# Altium PCB idealdiodeOR.PcbDoc
Units mil, origin at the board's own origin, x right, y up, seen from the top; angles counter-clockwise.
Board outline 2435.85 x 2620.85 mil, 2 copper layers (Top Layer, Bottom Layer); 62 components, 21 nets, 165 pads, 24 vias.
Unrouted connection lines stored in the file: 15.
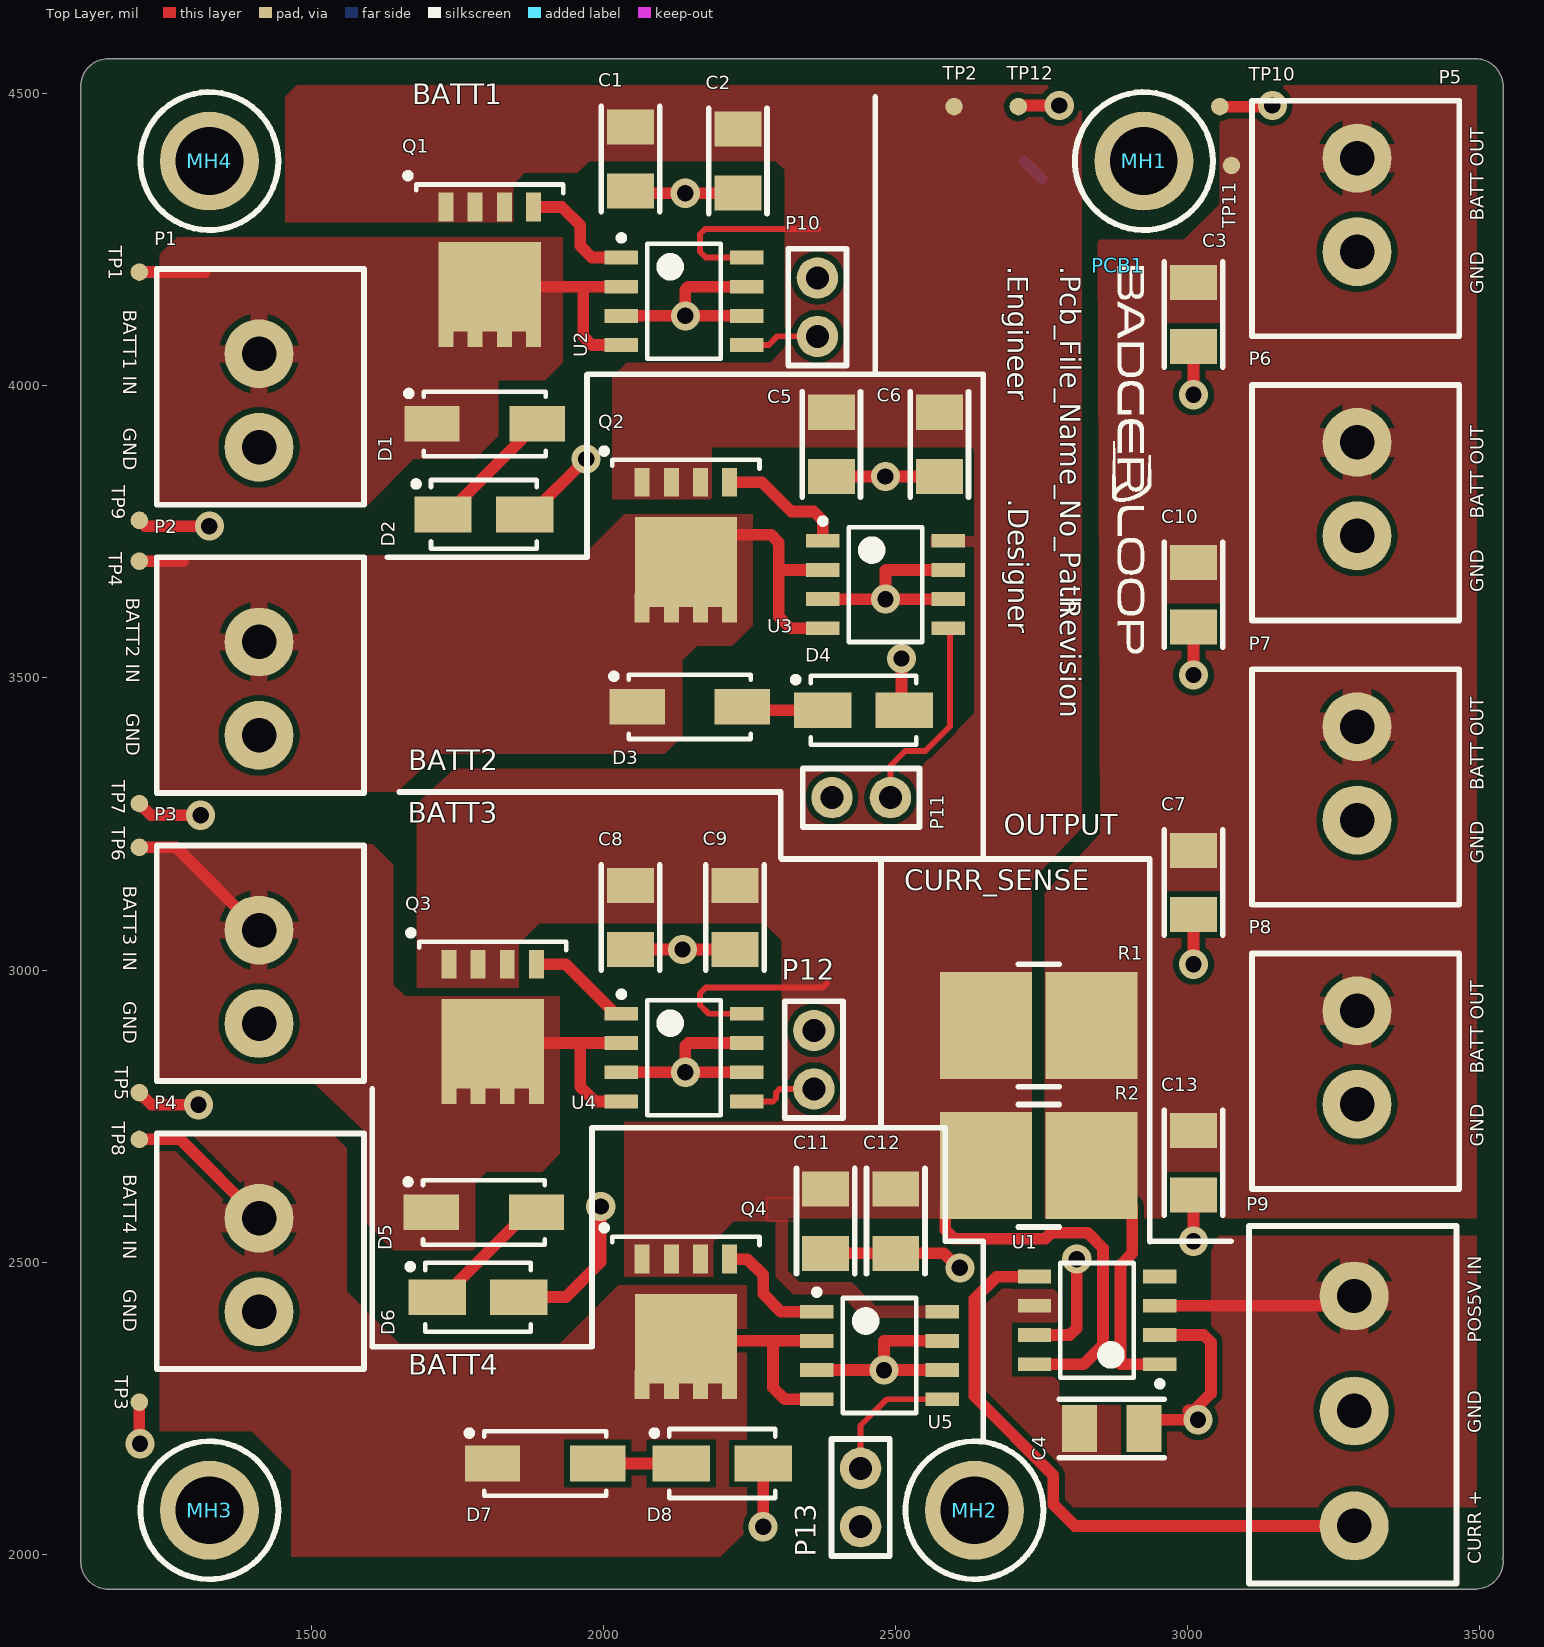
[diagram p0: Top Layer view]
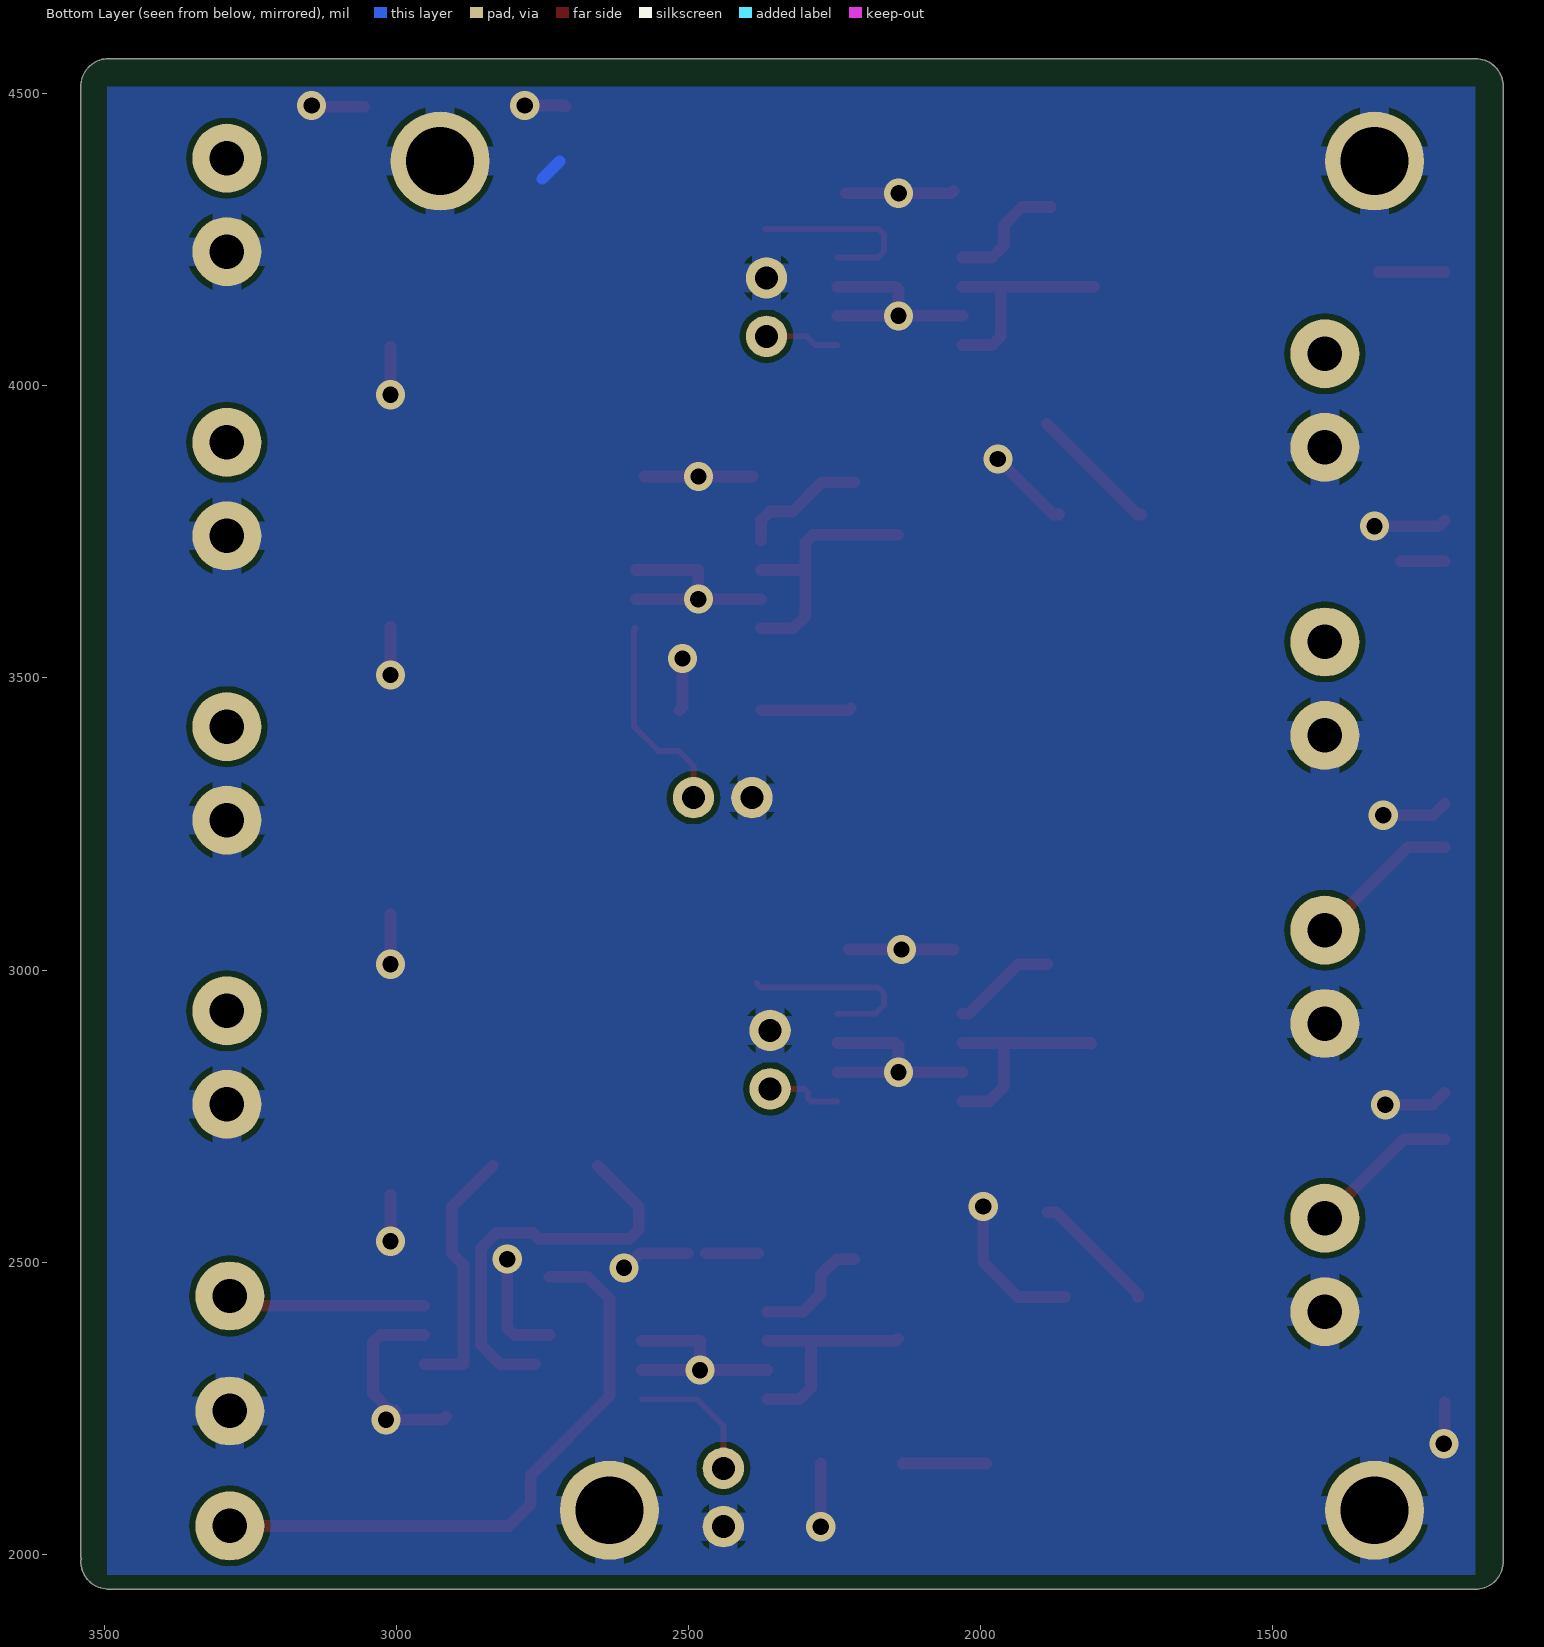
[diagram p1: Bottom Layer view, seen from below]
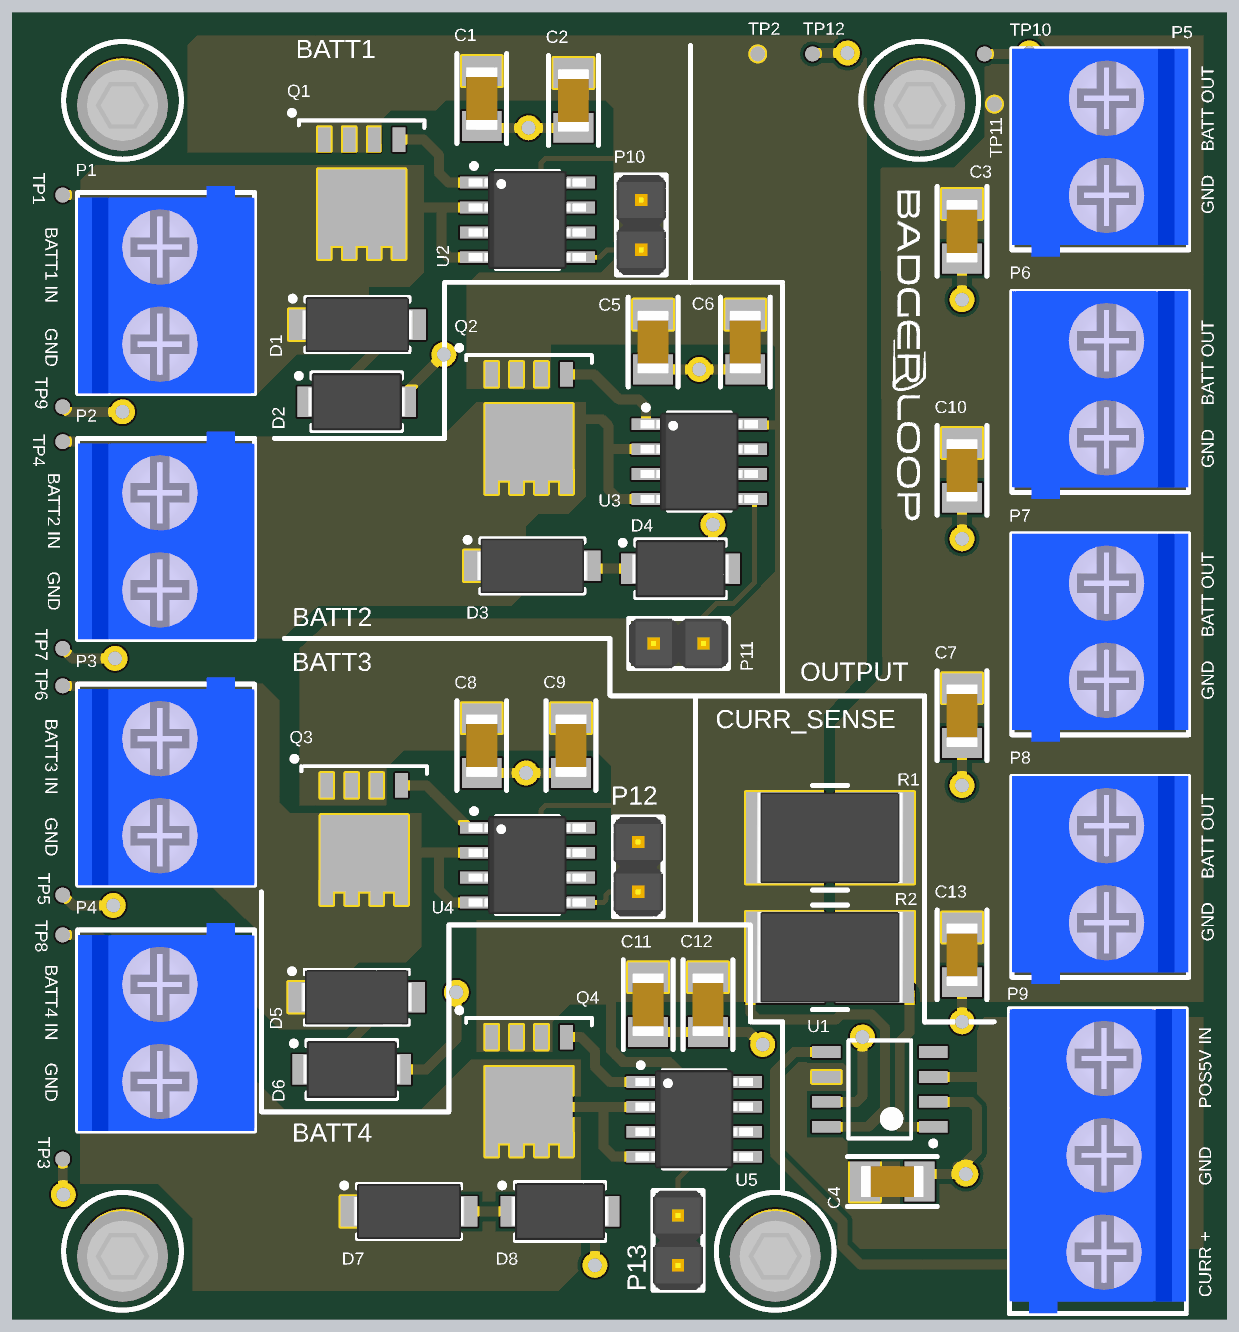
[diagram p2: 3D render of the assembled board from above, using the file's embedded part models]

## Layer stack, top to bottom
Top Solder: solder mask 0.4, Solder Resist, Dk 3.5
Top Layer: signal copper 1.4
Dielectric 1: dielectric 12.6, FR-4, Dk 4.8
Bottom Layer: signal copper 1.4
Bottom Solder: solder mask 0.4, Solder Resist, Dk 3.5

## Board outline
1104.73,1983.77 cw(c1109.59,1985) 1104.57,1985 1104.57,4512.4 cw(c1152.6,4512.4) 1152.6,4560.43 cw(c1152.6,4555.41) 1152.64,4560.43 3492.4,4560.43 cw(c3492.4,4555.41) 3492.4,4560.43 cw(c3492.4,4512.4) 3492.4,4560.43 3495,4560.43 cw(c3495,4555.41) 3496.23,4560.27 cw(c3492.4,4512.4) 3540.43,4512.4 cw(c3535.41,4512.4) 3540.28,4511.2 cw(c3535.41,4510) 3540.43,4510 cw(c3535.41,4510) 3540.43,4510 3540.03,1995 cw(c3535.01,1995) 3538.79,1991.7 cw(c3535.41,1988) 3540.43,1988 cw(c3492.4,1988) 3494.45,1940.01 cw(c3492.4,1944.59) 3492.4,1939.57 1152.6,1939.57 cw(c1152.6,1987.6)

## Design rules (kind name [scope] priority, off if disabled: settings)
Clearance [All] p1: gap=10 ignorepadtopadclearanceinfootprint=FALSE except(0: Arc-Hole Track-Hole SMDPad-Hole THPad-Hole Via-Hole Fill-Hole Poly-Hole Region-Hole Text-Hole)
HoleSize [All] p1: absolutevalues=TRUE maxlimit=250 minlimit=1 maxpercent=80.000 minpercent=20.000
MinimumSolderMaskSliver [All] p1: minsoldermaskwidth=5
PlaneConnect [All] p1: planeconnectstyle=Direct reliefexpansion=20 reliefentries=4 reliefconductorwidth=10 reliefairgap=10
PolygonConnect [All] p1: thpad.connectstyle=Relief thpad.reliefconductorwidth=50 thpad.reliefentries=4 thpad.polygonreliefangle="90 Angle" thpad.airgapwidth=10 smdpad.connectstyle=Direct smdpad.reliefconductorwidth=10 smdpad.reliefentries=4 smdpad.polygonreliefangle="90 Angle" smdpad.airgapwidth=10 via.connectstyle=Direct via.reliefconductorwidth=10 via.reliefentries=4 via.polygonreliefangle="90 Angle" via.airgapwidth=10
RoomDefinition idealdiodeOR [InComponentClass('idealdiodeOR')] p1: confinementstyle=ConfineIn formatcopy=TRUE lockcomponents=FALSE outline 1145,1930 3540,1930 3540,4565 1145,4565
RoutingVias [All] p1: holewidth=28 width=50 viastyle="Through Hole" minholewidth=28 minwidth=50 maxholewidth=28 maxwidth=50
SilkToSolderMaskClearance [IsPad] p1: minsilkscreentomaskgap=5 clearancetoexposedcopper=TRUE
SolderMaskExpansion [All] p1: expansion=4
Width [All] p1: maxlimit=100 minlimit=10 preferedwidth=10 minimp=50.000000 maximp=50.000000 favimp=50.000000
26 further rules are at their usual default settings.

## Components (designator, comment, footprint, x,y, rotation, side; value= is the part's Value field where it differs from the comment)
C1 "4700pF" SMD-1206C 2046.06,4388.76 r0 top
C2 "4700pF" SMD-1206C 2230,4385 r0 top
C3 "4700pF" SMD-1206C 3010,4122.31 r0 top
C4 "4700pF" SMD-1206C 2870,2215 r90 top
C5 "4700pF" SMD-1206C 2390,3900 r0 top
C6 "4700pF" SMD-1206C 2575,3900 r0 top
C7 "4700pF" SMD-1206C 3010,3150 r0 top
C8 "4700pF" SMD-1206C 2046.06,3090 r0 top
C9 "4700pF" SMD-1206C 2225,3090 r0 top
C10 "4700pF" SMD-1206C 3010,3642.5 r0 top
C11 "4700pF" SMD-1206C 2380,2570 r0 top
C12 "4700pF" SMD-1206C 2500,2570 r0 top
C13 "4700pF" SMD-1206C 3010,2670 r0 top
D1 "SMAJ24A" INDM5026X18N 1796.4,3935 r0 top
D2 "SMAT70A" SMAT70A 1665,3710 r0 top
D3 "SMAJ24A" INDM5026X18N 2147.5,3450.73 r0 top
D4 "SMAT70A" SMAT70A 2315,3375 r0 top
D5 "SMAJ24A" INDM5026X18N 1795,2585 r0 top
D6 "SMAT70A" SMAT70A 1655,2370 r0 top
D7 "SMAJ24A" INDM5026X18N 1900,2155 r0 top
D8 "SMAT70A" SMAT70A 2073.1,2085 r0 top
MH1 "4-40 Mount Hole" MH 2925,4385 r0 top
MH2 "4-40 Mount Hole" MH 2635,2075 r0 top
MH3 "4-40 Mount Hole" MH 1325,2075 r0 top
MH4 "4-40 Mount Hole" MH 1325,4385 r0 top
P1 "Screw Terminal 2x1" "2POS TERM BLOCK" 1410,3895 r90 top
P2 "Screw Terminal 2x1" "2POS TERM BLOCK" 1410,3401.67 r90 top
P3 "Screw Terminal 2x1" "2POS TERM BLOCK" 1410,2908.33 r90 top
P4 "Screw Terminal 2x1" "2POS TERM BLOCK" 1410,2415 r90 top
P5 "Screw Terminal 2x1" "2POS TERM BLOCK" 3290,4390 r270 top
P6 "Screw Terminal 2x1" "2POS TERM BLOCK" 3290,3903.33 r270 top
P7 "Screw Terminal 2x1" "2POS TERM BLOCK" 3290,3416.67 r270 top
P8 "Screw Terminal 2x1" "2POS TERM BLOCK" 3290,2930 r270 top
P9 "Screw Terminal 3x1" "3POS TERM BLOCK" 3285,2441.85 r270 top
P10 "Header 2" "Pin Header 1x2 TH Pitch 2.54mm" 2366.05,4085 r90 top
P11 "Header 2" "Pin Header 1x2 TH Pitch 2.54mm" 2491.05,3295 r180 top
P12 "Header 2" "Pin Header 1x2 TH Pitch 2.54mm" 2360,2796.55 r90 top
P13 "Header 2" "Pin Header 1x2 TH Pitch 2.54mm" 2440,2146.9 r270 top
PCB1 "PCB" PCB 2880,4206.55 r270 top
Q1 "STL90N6F7" DPAK228P991X238-4N 1805,4195 r180 top
Q2 "STL90N6F7" DPAK228P991X238-4N 2140.91,3723.58 r180 top
Q3 "STL90N6F7" DPAK228P991X238-4N 1810,2898.58 r180 top
Q4 "STL90N6F7" DPAK228P991X238-4N 2140.91,2393.58 r180 top
R1 "WSHM2818R0100FEA" CAPMP7146X15N 2745,2905 r0 top
R2 "WSHM2818R0100FEA" CAPMP7146X15N 2745,2665 r0 top
TP1 "TP" "Test Point" 1205,4195 r0 top
TP2 "TP" "Test Point" 2600,4478.28 r0 top
TP3 "TP" "Test Point" 1205,2260 r0 top
TP4 "TP" "Test Point" 1205,3700 r0 top
TP5 "TP" "Test Point" 1205,2790 r0 top
TP6 "TP" "Test Point" 1205,3210 r0 top
TP7 "TP" "Test Point" 1205,3285 r0 top
TP8 "TP" "Test Point" 1205,2710 r0 top
TP9 "TP" "Test Point" 1205,3770 r0 top
TP10 "TP" "Test Point" 3055,4478.28 r0 top
TP11 "TP" "Test Point" 3075,4377.5 r0 top
TP12 "TP" "Test Point" 2710,4478.28 r0 top
U1 "INA240x" SOIC127P600X175-8N 2845,2400 r180 top
U2 "LTC4359" 8SOP 1992.72,4035 r0 top
U3 "LTC4359" 8SOP 2337.72,3550 r0 top
U4 "LTC4359" 8SOP 1992.72,2740 r0 top
U5 "LTC4359" 8SOP 2327.28,2230 r0 top

## Footprints (in the part's own frame and the unit in brackets; to place one, negate y for a bottom-side part, rotate by r counter-clockwise, add the part's x,y. Pads: shape width x height; smd on the part's side, far side on the other; paste and mask are expansions set on the pad)
"2POS TERM BLOCK" [mm] "5mm Pitch"
  round 3 hole 1.5: 1(0,0) 2(4.064,0)
  silkscreen extent -2.5,-4.57 7.75,4.45, body extent -2.51,-4.57 8.09,4.43, height 12.6
"3POS TERM BLOCK" [mm] "5mm Pitch"
  round 3 hole 1.5: 1(0,0) 2(5,0) 3(10,0)
  silkscreen extent -3.05,-4.57 12.5,4.45, body extent -3.03,-4.57 12.49,4.43, height 12.6
8SOP [mm]
  rect 1.45x0.6 smd: 1(0.958,4.699) 2(0.958,3.429) 3(0.958,2.159) 4(0.958,0.889) 5(6.408,0.889) 6(6.408,2.159) 7(6.408,3.429) 8(6.408,4.699)
  silkscreen extent 0.83,0.29 5.28,5.67, body extent 0.69,0.29 6.68,5.29, height 1.75
CAPMP7146X15N [mm] "Molded Capacitor, 2-Leads, Body 7.10x4.60mm, IPC Medium Density"
  rect 4x4.65 smd: 1(-2.286,0) 2(2.286,0)
  silkscreen extent -0.89,-2.67 0.89,2.67, body extent -3.77,-2.3 3.77,2.3, height 1.5
DPAK228P991X238-4N [mm] "D-PAK, 4-Pads, Body 6.21x6.54mm (max), IPC Medium Density"
  rect 0.65x1.25 smd: 1(1.905,-2.83) 2(0.635,-2.83) 3(-0.635,-2.83) 4(-1.905,-2.83) 5(-1.905,2.631) 6(-0.635,2.631) 7(0.635,2.631) 8(1.905,2.631)
  rect 4.45x3.9 smd: 8(0,0.635)
  silkscreen extent -3.2,-4.32 3.68,-3.43, body extent -2.29,-2.79 2.29,2.92, height 1.45
INDM5026X18N [mm] "Molded Inductor, 2-Leads, Body 5.04x2.59mm, IPC Medium Density"
  rect 2.4x1.55 smd: 1(-2.286,0) 2(2.286,0)
  silkscreen extent -3.42,-1.4 2.65,1.45, body extent -2.86,-1.4 2.86,1.4, height 1.8
MH [mm] "#10 Mount Hole"
  round 4.3 hole 2.946 unplated: 2(0,0)
  silkscreen extent -3,-3 3,3, body extent -2.32,-2.58 2.32,2.07, height 2.84
PCB [mil]
  silkscreen extent 2,-9 665,58
"Pin Header 1x2 TH Pitch 2.54mm" [mm] "PinHeader 1x2 TH Pitch 2.54mm"
  round 1.8 hole 1: 1(0,0) 2(2.54,0)
  silkscreen extent -1.27,-1.27 3.81,1.27, body extent -1.27,-1.27 3.81,1.27, height 9.5
SMAT70A [mm]
  rect 2.5x1.55 smd: 1(1.524,1.778) 2(5.08,1.778)
  silkscreen extent 0.23,0.28 5.6,3.28, body extent 0.78,0.32 5.82,3.24, height 2.3
SMD-1206C [mil]
  rect 80x60 smd: 1(0,55) 2(0,-55)
  silkscreen extent -50,-90 50,90, body extent -31,-63 32,63, height 39
SOIC127P600X175-8N [mm] "SOIC, 8-Leads, Body 4.90x3.90mm, Pitch 1.27mm, IPC Medium Density"
  rect 1.45x0.6 smd: 1(-2.725,1.905) 2(-2.725,0.635) 3(-2.725,-0.635) 4(-2.725,-1.905) 5(2.725,-1.905) 6(2.725,-0.635) 7(2.725,0.635) 8(2.725,1.905)
  silkscreen extent -2.85,-2.5 1.6,2.88, body extent -2,-2.5 2,2.5, height 1.75
"Test Point" [mil] "SMD Test Point"
  round 30 smd: 1(0,0)

## Part data
C1 C2 C3 C4 C5 C6 C7 C8 C9 C10 C11 C12 C13: library part GCJ31BR72J472KXJ1L, "CAP CER 4700PF 630V X7R 1206", Manufacturer="Murata Electronics North America", Operating Temperature="-55°C ~ 125°C", Package / Case="1206 (3216 Metric)", Ratings=AEC-Q200, Temperature Coefficient=X7R, Tolerance=±10%, Voltage=630V, @ qty=0, Applications="Automotive, Boardflex Sensitive", Datasheets=http://www.murata.com/~/media/webrenewal/support/library/catalog/products/capacitor/mlcc/c03e.ashx, Digikey P/N=490-5610-1-ND, Factory Stock=0, Features="Soft Termination", Height - Seated (Max)=-, Image=//media.digikey.com/Renders/Murata%20Renders/GR331BD72E473KW01L.jpg, Lead Spacing=-, Lead Style=-, Minimum Quantity=1, Mounting Type="Surface Mount, MLCC", Packaging="Cut Tape (CT)", Part Number=GCJ31BR72J472KXJ1L, Part Status=Active, Quantity Available=6697, Series=GCJ, Size / Dimension="0.126\" L x 0.063\" W (3.20mm x 1.60mm)", Thickness (Max)="0.049\" (1.25mm)", Unit Price (USD)=0.48
D1 D3 D5 D7: "TVS DIODE 24V 38.9V DO214AC", Manufacturer="LittelFuse Inc", Digikey Link=https://www.digikey.com/product-detail/en/littelfuse-inc/SMAJ24A/SMAJ24ALFCT-ND/762500, Digikey P/N=SMAJ24ALFCT-ND, Manufacturer P/N=SMAJ24A
D2 D4 D6 D8: "TVS DIODE 70V 100V SMA", Manufacturer="Diodes Incorporated", Manufacturer P/N=SMAT70A-13-F, Digikey Link=https://www.digikey.com/product-detail/en/diodes-incorporated/SMAT70A-13-F/SMAT70A-FDICT-ND/804910, Digikey P/N=SMAT70A-FDICT-ND
P1 P2 P3 P4 P5 P6 P7 P8: "Screw Terminal, 2-Pin"
P9: "Screw Terminal, 3-Pin", LatestRevisionDate=17-Jul-2002, LatestRevisionNote="Re-released for DXP Platform.", Publisher="Altium Limited"
P10 P11 P12 P13: "Header, 2-Pin", LatestRevisionDate=17-Jul-2002, LatestRevisionNote="Re-released for DXP Platform.", Publisher="Altium Limited"
Q1 Q2 Q3 Q4: "MOSFET N-CH 60V 90A F7 8PWRFLAT", Manufacturer=497-15913-2-ND, Digikey Link=https://www.digikey.com/product-detail/en/stmicroelectronics/STL90N6F7/497-15913-1-ND/5357115, Digikey P/N=497-15913-2-ND, Manufacturer P/N=STL90N6F7
R1 R2: "RES 0.01 OHM 1% 7W 2818", Manufacturer="Vishay Dale", Power Rating=7W, Resistance=10m, Digikey Link=https://www.digikey.com/product-detail/en/vishay-dale/WSHM2818R0100FEA/541-2626-1-ND/5419333, Digikey P/N=541-2626-1-ND, Manufacturer P/N=WSHM2818R0100FEA
U1: "IC AMP CURRENT SENSE 8-TSSOP", Manufacturer=TI, Manufacturer P/N=INA240A1PWR, Digikey Link=https://www.digikey.com/product-detail/en/texas-instruments/INA240A1PWR/296-45088-1-ND/6562101, Digikey P/N=296-45088-1-ND
U2 U3 U4 U5: "IC OR CTRLR N+1 8MSOP", Manufacturer="Analog Devices", Digikey Link=https://www.digikey.com/product-detail/en/linear-technology-analog-devices/LTC4359HMS8-TRPBF/LTC4359HMS8-TRPBFCT-ND/8275335, Digikey P/N=LTC4359HMS8#TRPBFCT-ND, Manufacturer P/N=LTC4359

## Via types
v1: diameter 50, hole 28, Top Layer to Bottom Layer, 24 vias

## Nets (pads, with @x,y where several pads share a name; then routed paths per layer and width w, separated by ;. In a path a pad name is that pad's centre, name@x,y a point inside that pad or via, vN(x,y) a via of type N, cw(c..) or ccw(c..) an arc to the next point about the centre after c; other vN are vias at no path point)
BATT1: D1.1 P1.2 Q1.5 Q1.6 Q1.7 Q1.8 TP1.1 U2.2 U2.4 | length 494.4
  Top Layer w20: TP1.1 1317.31,4195 ; Q1.8@1805,4170 1965,4170 ; U2.4 1980,4070 1965,4085 1965,4170 ; U2.2 1965,4170
BATT2: D3.1 P2.2 Q2.5 Q2.6 Q2.7 Q2.8 TP4.1 U3.2 U3.4 | length 525.6
  Top Layer w20: TP4.1 1280,3700 ; Q2.8@2140.91,3745 2286.88,3745 2300,3731.88 2300,3685 ; U3.4 2320,3585 2300,3605 2300,3685 ; U3.2 2300,3685
BATT3: D5.1 P3.2 Q3.5 Q3.6 Q3.7 Q3.8 TP6.1 U4.2 U4.4 | length 640.5
  Top Layer w20: TP6.1 1268.33,3210 P3.2 ; Q3.8@1810,2873.58 1811.42,2875 1960,2875 ; U4.4 1985,2775 1960,2800 1960,2875 ; U4.2 1960,2875
BATT4: D7.1 P4.2 Q4.5 Q4.6 Q4.7 Q4.8 TP8.1 U5.2 U5.4 | length 649.8
  Top Layer w20: TP8.1 1275,2710 P4.2 ; Q4.8@2140.91,2368.58 2144.49,2365 2290,2365 ; U5.4 2310,2265 2290,2285 2290,2365 ; U5.2 2290,2365
GND: C1.2 C2.2 C3.2 C4.2 C5.2 C6.2 C7.2 C8.2 C9.2 C10.2 C11.2 C12.2 C13.2 D2.2 D4.2 D6.2 D8.2 MH1.2 MH2.2 MH3.2 MH4.2 P1.1 P2.1 P3.1 P4.1 P5.2 P6.2 P7.2 P8.2 P9.2 P10.2 P11.2 P12.2 P13.2 TP3.1 TP5.1 TP7.1 TP9.1 TP10.1 TP12.1 U1.2 U1.7 U2.3 U2.6 U2.7 U3.3 U3.6 U3.7 U4.3 U4.6 U4.7 U5.3 U5.6 U5.7 | length 4323.9
  Top Layer w20: TP3.1 1205,2190 v1(1206.25,2188.75) ; TP5.1 1225.81,2769.19 v1(1306.45,2769.19) ; TP7.1 1225,3265 v1(1310,3265) ; TP9.1 1215,3760 v1(1325,3760) ; D6.2 1935,2440 1995,2500 v1(1995,2595) ; D2.2 1875,3780 v1(1970,3875) ; U4.3 v1(2140,2825) ; U2.3 v1(2140,4120) ; C8.2 v1(2135,3035) C9.2 ; C1.2 2049.82,4330 C2.2 ; U4.6 v1(2140,2825) ; U4.7 2145,2875 2140,2870 v1(2140,2825) ; U2.6 v1(2140,4120) ; U2.7 2145,4170 2140,4165 v1(2140,4120) ; v1(2273.1,2046.9) D8.2 ; U5.3 v1(2480,2315) ; U3.3 v1(2482.72,3635) ; C11.2 C12.2@2470,2515 ; C5.2 C6.2 ; C12.2 2582.57,2515 2607.57,2490 v1(2610,2490) ; v1(2510,3533.47) 2510,3450 D4.2 ; U5.6 v1(2480,2315) ; U5.7 2480,2365 v1(2480,2315) ; U3.6 v1(2482.72,3635) ; U3.7 2483.33,3685 2482.72,3684.38 v1(2482.72,3635) ; TP12.1 2711.83,4480.1 v1(2780,4480.1) ; U1.7 2798.19,2375 2810,2386.81 v1(2810,2505) ; C4.2@2915,2235 2920,2230 v1(3017.65,2230) 3016.55,2230 v1@3011.55,2235 ; U1.2 3027.65,2375 3040,2362.65 3040,2275 3010.69,2245.69 v1@3000.86,2245.69 ; v1(3010,2535.61) C13.2 ; v1(3010,3010) C7.2 ; v1(3010,3505) C10.2 ; v1(3010,3985) C3.2 ; TP10.1 3143.17,4478.28 v1(3145,4480.1)
  Bottom Layer w20: 2720,4385 2750,4355
  other v1: 2482.5,3845 2139.91,4330
NetC1_1: C1.1 C2.1 C5.1 C6.1 C8.1 C9.1 C11.1 C12.1 Q1.1 Q1.2 Q1.3 Q2.1 Q2.2 Q2.3 Q3.1 Q3.2 Q3.3 Q4.1 Q4.2 Q4.3 R1.1 R2.1 TP2.1 U1.8 U2.8 U3.8 U4.8 U5.8 | length 1354.3
  Top Layer w10: U4.8 2180,2925 2165,2940 2165,2960 2175,2970 2375.19,2970 2382.91,2977.72 ; U2.8 2175,4220 2165,4230 2165,4260 2173.55,4268.55 2368.14,4268.55
  Top Layer w20: R2.1 2585,2595 2585,2555 2600,2540 2756.36,2540 2766.36,2550 2828.64,2550 2855,2523.64 2855,2358.19 2821.81,2325 U1.8@2762.5,2325
NetC3_1: C3.1 C7.1 C10.1 C13.1 P5.1 P6.1 P7.1 P8.1 R1.2 R2.2 TP11.1 U1.1 | length 462.2
  Top Layer w20: R2.2 2905,2595 2905,2515 2885,2495 2885,2325 U1.1 ; P5.1@3277.5,4377.5 P5.1
NetD1_2: D1.2 D2.1 | length 225.6
  Top Layer w20: D2.1 1731.4,3780 D1.2
NetD3_2: D3.2 D4.1 | length 153.8
  Top Layer w20: D3.2@2222.31,3447.69 2225,3445 D4.1
NetD5_2: D5.2 D6.1 | length 218
  Top Layer w20: D6.1@1730,2440 1730,2445 1870,2585 D5.2
NetD7_2: D7.2 D8.1 | length 143.1
  Top Layer w20: D7.2 D8.1
NetP9_3: P9.3 U1.5 | length 1056.8
  Top Layer w20: U1.5 2672.8,2475 2635,2437.2 2635,2270 2770,2135 2770,2085 2806.85,2048.15 P9.3
NetP10_1: P10.1 U2.5 | length 127.3
  Top Layer w10: U2.5 2245.19,4070.19 2282.69,4070.19 2297.5,4085 P10.1
NetP11_1: P11.1 U3.5 | length 355.6
  Top Layer w10: P11.1 2491.05,3349.55 2516.5,3375 2550.81,3375 2593.19,3417.37 2593.19,3585 U3.5
NetP12_1: P12.1 U4.5 | length 129.8
  Top Layer w10: U4.5 2290,2775 2295,2780 2295,2790 2301.55,2796.55 P12.1
NetP13_1: P13.1 U5.5 | length 231.3
  Top Layer w10: P13.1 2440,2220 2485,2265 U5.5
NetQ1_4: Q1.4 U2.1 | length 206.7
  Top Layer w20: Q1.4 1928.58,4306.42 1960,4275 1960,4240 1980,4220 U2.1
NetQ2_4: Q2.4 U3.1 | length 221.2
  Top Layer w20: Q2.4 2271.2,3835 2321.2,3785 2360,3785 2375.43,3769.57 U3.1
NetQ3_4: Q3.4 U4.1 | length 180.6
  Top Layer w20: Q3.4 1935,3010 2020,2925 U4.1
NetQ4_4: Q4.4 U5.1 | length 205.4
  Top Layer w20: Q4.4 2246.08,2505 2273.1,2477.98 2273.1,2445.44 2303.54,2415 U5.1
POS5V: C4.1 P9.1 U1.3 U1.6 | length 339.7
  Top Layer w20: U1.3 3268.15,2425 P9.1
pads on no net: U1.4

## Polygon pours and split planes (outlines as drawn)
GND on Bottom Layer "Bottom Layer-GND" (solid, pour order 0): 1152.6,4512.4 1152.6,1965 3495,1965 3495,4512.4
NetC3_1 on Top Layer "Top Layer-NetC3_1" (solid, pour order 68): 3495,2575 3495,4515 3055,4515 3055,4311.42 2993.58,4250 2846.03,4250 2849.98,3233.19 2755,3131.43 2755,2575 3065,2575
BATT4 on Top Layer "Top Layer-BATT4" (solid, pour order 64): 2245,2040 2245,2235 2245,2460 2025,2460 1925,2360 1650,2360 1560,2450 1560,2695 1535,2720 1238.56,2720 1240.2,1995 1239.74,2210 1397.25,2210 1465,2142.25 1465,1995 1240.21,1995 1240.2,1995 2200,1995
NetC1_1 on Top Layer "Top Layer-NetC1_1" (solid, pour order 60): 1680,2970 1855,2970 1855,3045 1890,3080 2275,3080 2305,3050 2305,2934.89 2305,2915 2305,2740 2035,2740 2035,2475 2187.5,2475 2187.5,2535 2222.5,2570 2295,2570 2295,2475 2325,2445 2405,2445 2445,2405 2600,2405 2600,2425 2465,2425 2425,2465 2335.2,2465 2315,2485.2 2315,2575 2733.35,2575 2733.35,3152.54 2818.93,3243.59 2818.93,4509.42 2813.35,4515 1475,4515 1455,4495 1455,4280 1845,4280 1845,4345 1865,4365 1955,4365 1975,4385 2295,4385 2310,4370 2310,4065 2285,4040 2040,4040 2015,4015 2015,3806.22 2185,3804.77 2185,3895 2630,3895 2635,3890 2635,3742.4 2560,3742.4 2560,3724.61 2635,3724.61 2635,3440 2540,3345 1745,3345 1680,3285
POS5V on Top Layer "Top Layer-POS5V" (solid, remove dead copper, pour order 56): 3495,2545 3040,2545 3040,2320.86 2974.14,2255 2780,2255 2780,2455 2655,2455 2655,2125 2700,2080 3495,2080
no net on Top Layer "Top Layer-No Net" (solid, pour order 42): 2306.25,2570
NetC1_1 on Top Layer "Top Layer-NetC1_1 1" (solid, pour order 40): 2332.5,2570 2280,2570 2280,2610 2335,2610
BATT2 on Top Layer "Top Layer-BATT2" (solid, pour order 34): 1237.5,3305 1645.71,3305 1717.68,3370 2105,3370 2135,3400 2135,3530 2160,3555 2220,3555 2255,3590 2255,3780 2035,3780 1965,3710 1240,3710 1235,3705 1237.5,3702.5
BATT3 on Top Layer "Top Layer-BATT3" (solid, pour order 6): 1238.56,3210 1243.56,3215 1605,3215 1640,3180 1640,2975 1660,2955 1925,2955 1925,2685 1895,2655 1800,2655 1780,2635 1780,2520 1640,2520 1595,2565 1595,2720 1495,2815 1238.56,2815
BATT1 on Top Layer "Top Layer-BATT1" (solid, pour order 2): 1240.38,4225.38 1270,4255 1930,4255 1930,4040 1900,4010 1820,4010 1820,3915 1780,3875 1675,3875 1595,3795 1235,3795

## Other copper
Top Layer:
  text ".Layer_Name" at 1242.17,1755 h60
Bottom Layer:
  text ".Layer_Name" at 1240,1755 h60

## Silkscreen, mask and mechanical layers (free items; w line width, h text height)
Top Overlay:
  lines w10: 1603.75,2796.25 1603.75,2355 1980,2355 1980,2730 2475,2730 ; 1630,3706.67 1971.67,3706.67 1971.67,4012.53 ; 1650,3305 2303.24,3305 2303.24,3191.76 2305,3190 2650,3190 ; 1971.67,3978.33 1971.67,4019.28 1972.38,4020 2650,4020 2650,3190 ; 2465,4019.95 2465,4495 ; 2465,4020 2465,4070 ; 2475,3190 2475,2730 ; 2585,2535.61 2585,2730 2475,2730 ; 2588.76,2535.61 2650,2535.61 2650,2195 ; 2935.61,2535 2935,2535.61 ; 3074.39,2535.61 2935,2535.61 ; 2650,3190 2935,3190 2935,2590 2935,2535.61
  text "BATT1" at 1672.4,4470 h60
  text "BATT OUT" at 3515,4282.78 h40 r90
  text "GND" at 3515,4157.17 h40 r90
  text "BATT1 IN" at 1170,4130.7 h40 r270
  text "GND" at 1170,3928.44 h40 r270
  text "BATT OUT" at 3515,3772.78 h40 r90
  text "GND" at 3515,3647.17 h40 r90
  text "BATT2 IN" at 1175,3637.37 h40 r270
  text "GND" at 1175,3439.5 h40 r270
  text "BATT2" at 1665.39,3330 h60
  text "BATT OUT" at 3515,3307.78 h40 r90
  text "BATT3" at 1665,3240 h60
  text "OUTPUT" at 2685,3220 h60
  text "GND" at 3515,3182.17 h40 r90
  text "BATT3 IN" at 1170,3144.04 h40 r270
  text "CURR_SENSE" at 2515,3125 h60
  text "GND" at 1170,2946.17 h40 r270
  text "BATT OUT" at 3515,2822.78 h40 r90
  text "GND" at 3515,2697.17 h40 r90
  text "BATT4 IN" at 1170,2650.7 h40 r270
  text "GND" at 1170,2453.44 h40 r270
  text "POS5V IN" at 3510,2362.23 h40 r90
  text "BATT4" at 1665.14,2295 h60
  text "GND" at 3510,2207.17 h40 r90
  text "CURR +" at 3510,1982.96 h40 r90
BoardOutline:
  lines w10: 1109.59,1985 1109.59,4512.4 cw(c1152.6,4512.4) 1152.6,4555.41 3495,4555.41 ; 1109.59,1987.6 ccw(c1152.6,1987.6) 1152.6,1944.59 3492.4,1944.59 ; 3492.4,1944.98 ccw(c3492.4,1988) 3535.41,1988 ; 3492.4,4555.41 cw(c3492.4,4512.4) 3535.41,4512.4 ; 3535.01,1995 3535.41,4510
DesignerNotes:
  drawing of 46 lines, arcs and shapes, not listed
  text "1" at 1258.84,8327.5 h70
  text "2" at 3754.5,8327.5 h70
  text "3" at 6243.84,8327.5 h70
  text "4" at 8750.51,8327.5 h70
  text "A" at 102.5,7730 h70
  text "A" at 10745,7730 h70
  text "B" at 10742.5,5857 h70
  text "B" at 102.5,5804.5 h70
  text "C" at 10742.5,3482 h70
  text "C" at 102.5,3429.5 h70
  text "1.      PCB must be 0.030\" thick +/- 10% / 2.      Board Size: / 3.      Electrical Test / 4.      Coloring: / a.      Green Solder Mask Top / b.      Green Solder Mask Bottom / c.      White Silkscreen Top / d.      White Silkscreen Bottom / 5.      Via annular ring clearance is 10mil minimum / 6.      Vias are to be covered by soldermask (tented) /          Components with througholes are P1, J1, J2,          /  J6, P2, P10, P21, MH1-MH6 /          All other holes are Vias" at 7415,2985 h150
  text "ENGINEER:" at 6217.5,1267.5 h45
  text "TITLE:" at 7717.5,1267.5 h45
  text ".Engineer" at 6257.5,1145.35 h110
  text "D" at 10742.5,1112 h70
  text "D" at 102.5,1059.5 h70
  text ".PCB_FILE_NAME_NO_PATH" at 7812.5,1019.78 h200
  text "PCB DESIGNER:" at 6217.5,972.5 h45
  text ".Designer" at 6252.5,842.5 h110
  text "DATE:" at 6217.5,667.5 h45
  text "PART NO.:" at 7717.5,667.5 h45
  text "REV:" at 9817.5,667.5 h45
  text "Badgerloop" at 4917.5,567.5 h110
  text ".PRINT_DATE" at 6267.5,547.5 h110
  text ".Part_Number" at 7787.5,542.5 h110
  text ".Revision" at 9827.5,542.5 h110
  text "ERB Room 133" at 4917.5,467.5 h110
  text "1400 Engineering Drive" at 4917.5,367.5 h110
  text "FILE NAME:" at 6217.5,367.5 h45
  text "DWG NO:" at 7717.5,367.5 h45
  text "SCALE:" at 9817.5,367.5 h45
  text "Madison, WI 53706" at 4917.5,267.5 h110
  text ".PCB_FILE_NAME_NO_PATH" at 6267.5,247.5 h110
  text "1:1" at 9832.5,242.5 h110
  text "1" at 1258.84,27.5 h70
  text "2" at 3754.5,27.5 h70
  text "3" at 6243.84,27.5 h70
  text "4" at 8750.51,27.5 h70
Drill Drawing:
  drawing of 158 lines, arcs and shapes, not listed
  text "Layer" at 5050.34,7815 h60
  text "Name" at 5301.09,7815 h60
  text "Material" at 5785.65,7815 h60
  text "Thickness" at 6221.23,7815 h60
  text "Constant" at 6579.01,7815 h60
  text "Board Layer Stack" at 6910.28,7815 h60
  text "Symbol" at 851.87,7734.47 h72
  text "Count" at 1133.44,7734.47 h72
  text "Hole Size" at 1395.32,7734.47 h72
  text "Plated" at 1967.79,7734.47 h72
  text "Hole Type" at 2214.99,7734.47 h72
  text "Drill Layer Pair" at 2574.88,7734.47 h72
  text "Via/Pad" at 3255.86,7734.47 h72
  text "Pad Shape" at 3550.71,7734.47 h72
  text "Template" at 3935.98,7734.47 h72
  text "1" at 5050.34,7695 h60
  text "Top Overlay" at 5301.09,7695 h60
  text "24" at 1133.44,7610.52 h60
  text "28.00mil (0.711mm)" at 1395.32,7610.52 h60
  text "PTH" at 1967.79,7610.52 h60
  text "Round" at 2214.99,7610.52 h60
  text "Top Layer - Bottom Layer" at 2574.88,7610.52 h60
  text "Via" at 3255.86,7610.52 h60
  text "Rounded" at 3550.71,7610.52 h60
  text "v127h71" at 3935.98,7610.52 h60
  text "2" at 5050.34,7575 h60
  text "Top Solder" at 5301.09,7575 h60
  text "Solder Resist" at 5785.65,7575 h60
  text "0.40mil" at 6221.23,7575 h60
  text "3.5" at 6579.01,7575 h60
  text "8" at 1133.44,7486.56 h60
  text "39.37mil (1.000mm)" at 1395.32,7486.56 h60
  text "PTH" at 1967.79,7486.56 h60
  text "Round" at 2214.99,7486.56 h60
  text "Top Layer - Bottom Layer" at 2574.88,7486.56 h60
  text "Pad" at 3255.86,7486.56 h60
  text "Rounded" at 3550.71,7486.56 h60
  text "c180h100" at 3935.98,7486.56 h60
  text "3" at 5050.34,7455 h60
  text "Top Layer" at 5301.09,7455 h60
  text "Copper" at 5785.65,7455 h60
  text "1.40mil" at 6221.23,7455 h60
  text "19" at 1133.44,7362.6 h60
  text "59.06mil (1.500mm)" at 1395.32,7362.6 h60
  text "PTH" at 1967.79,7362.6 h60
  text "Round" at 2214.99,7362.6 h60
  text "Top Layer - Bottom Layer" at 2574.88,7362.6 h60
  text "Pad" at 3255.86,7362.6 h60
  text "Rounded" at 3550.71,7362.6 h60
  text "c300h150" at 3935.98,7362.6 h60
  text "4" at 5050.34,7335 h60
  text "Dielectric 1" at 5301.09,7335 h60
  text "FR-4" at 5785.65,7335 h60
  text "12.60mil" at 6221.23,7335 h60
  text "4.8" at 6579.01,7335 h60
  text "4" at 1133.44,7238.64 h60
  text "116.00mil (2.946mm)" at 1395.32,7238.64 h60
  text "NPTH" at 1967.79,7238.64 h60
  text "Round" at 2214.99,7238.64 h60
  text "Top Layer - Bottom Layer" at 2574.88,7238.64 h60
  text "Pad" at 3255.86,7238.64 h60
  text "Rounded" at 3550.71,7238.64 h60
  text "c430hn295" at 3935.98,7238.64 h60
  text "5" at 5050.34,7215 h60
  text "Bottom Layer" at 5301.09,7215 h60
  text "Copper" at 5785.65,7215 h60
  text "1.40mil" at 6221.23,7215 h60
  text "55 Total" at 1133.44,7114.69 h60
  text "6" at 5050.34,7095 h60
  text "Bottom Solder" at 5301.09,7095 h60
  text "Solder Resist" at 5785.65,7095 h60
  text "0.40mil" at 6221.23,7095 h60
  text "3.5" at 6579.01,7095 h60
  text "7" at 5050.34,6975 h60
  text "Bottom Overlay" at 5301.09,6975 h60